# Altium PCB pwm-tl494-smd.PcbDoc
Units mm, origin at the board's own origin, x right, y up, seen from the top; angles counter-clockwise.
Board outline 22 x 59.5 mm, 2 copper layers (Top Layer, Bottom Layer), stack 1.671 mm thick; 44 components, 38 nets, 155 pads, 35 vias.
Unrouted connection lines stored in the file: 19.
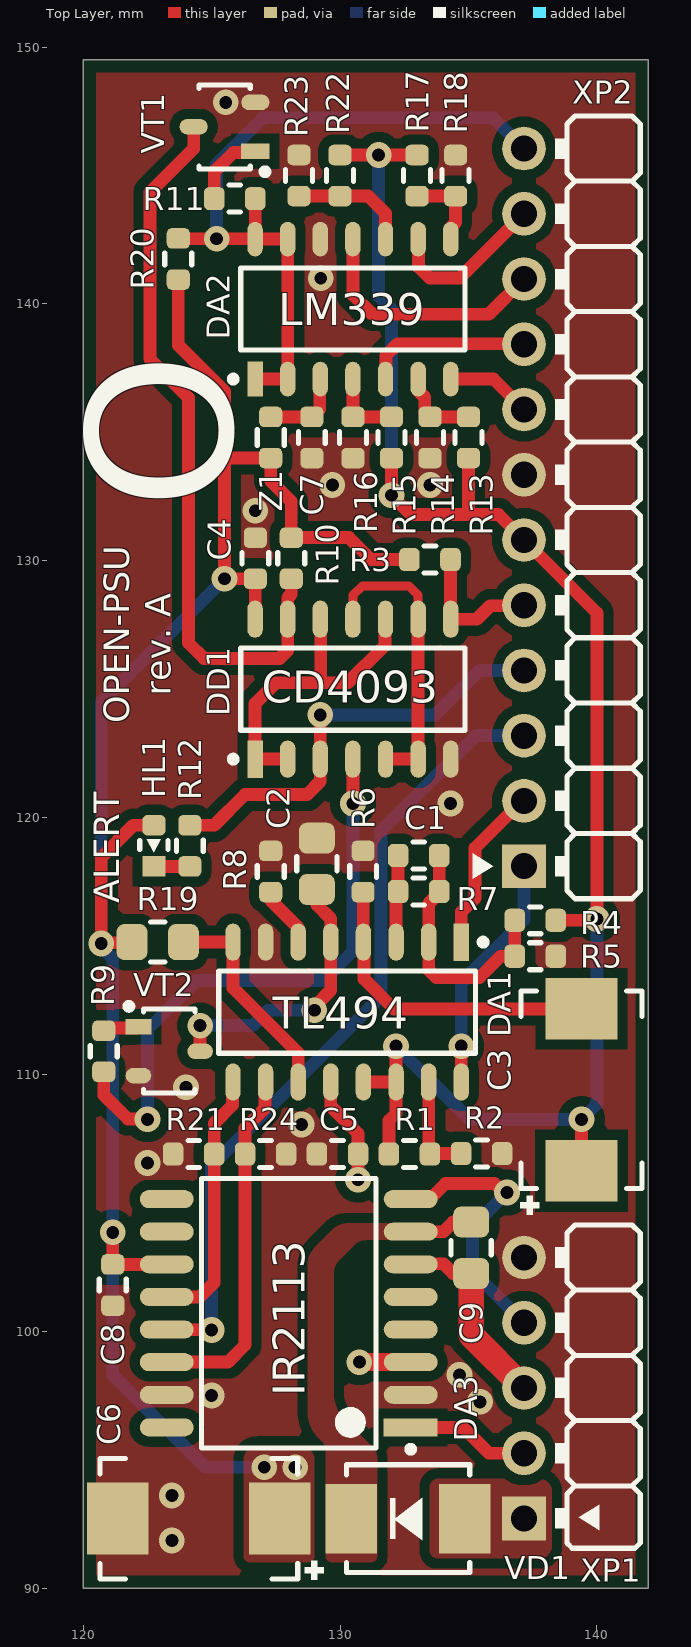
[diagram p0: Top Layer view]
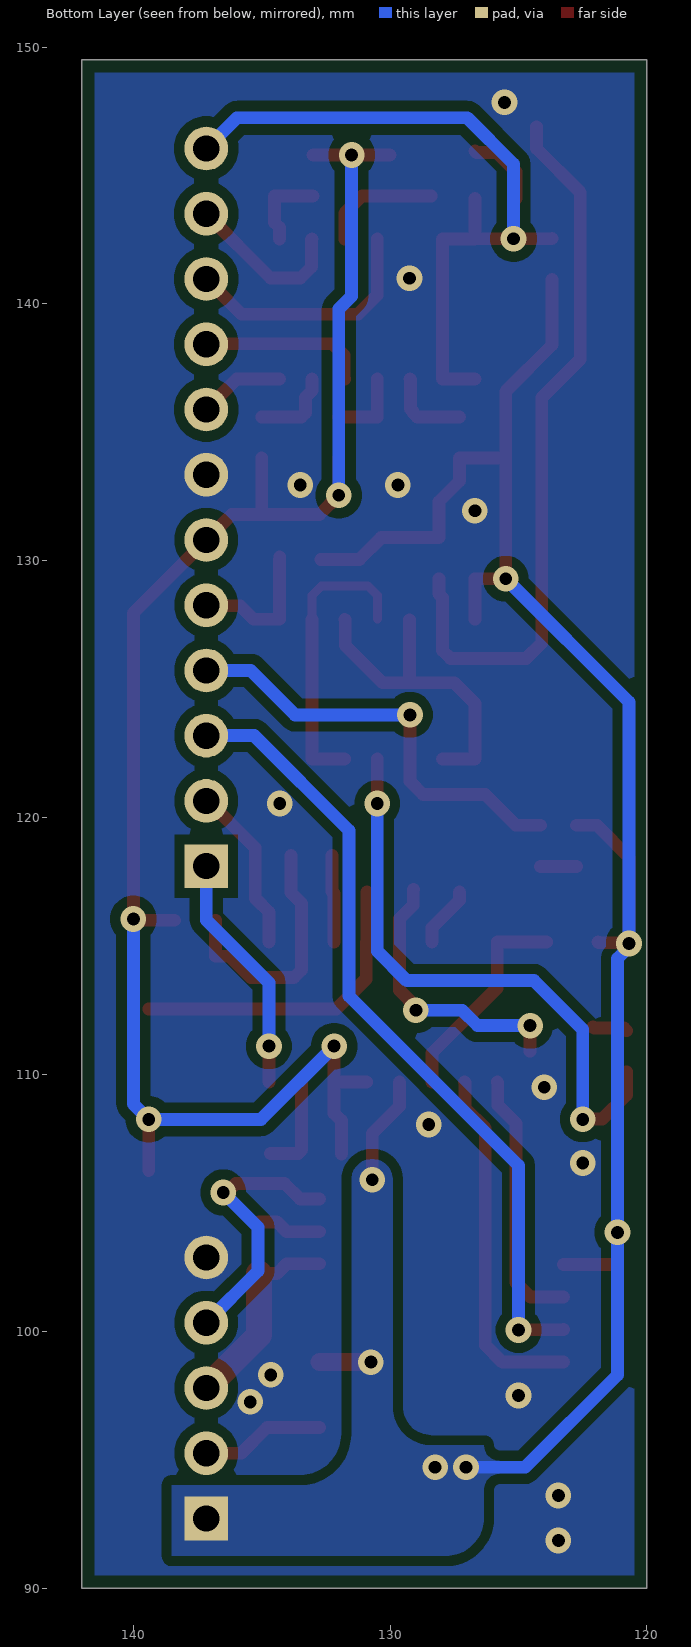
[diagram p1: Bottom Layer view, seen from below]
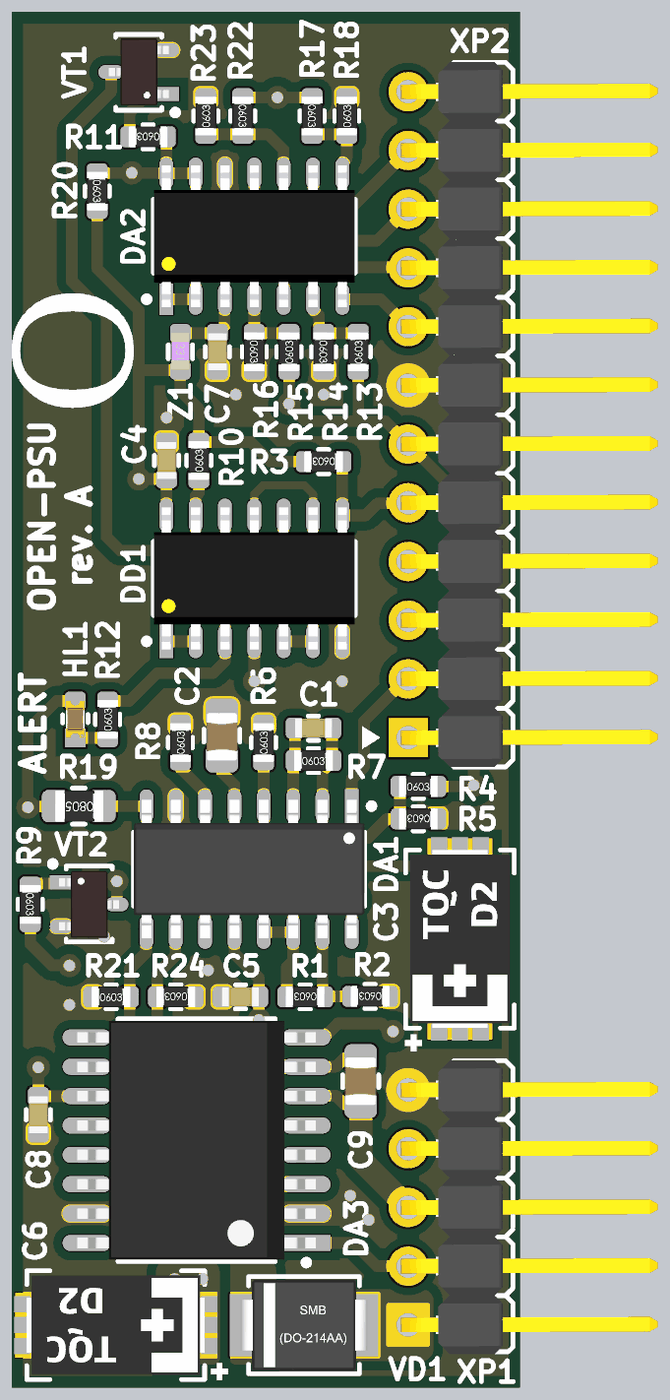
[diagram p2: 3D render of the assembled board from above, using the file's embedded part models]

## Layer stack, top to bottom
Top Solder: solder mask 0.0102, Solder Resist, Dk 3.5
Top Layer: signal copper 0.0356
Dielectric 1: dielectric 1.6, FR-4, Dk 4.8
Bottom Layer: signal copper 0.0356
Bottom Solder: solder mask 0.0102, Solder Resist, Dk 3.5

## Board outline
120,90 142,90 142,149.5 120,149.5

## Design rules (kind name [scope] priority, off if disabled: settings)
Clearance [All] p1: gap=0.4 ignorepadtopadclearanceinfootprint=FALSE
HoleSize [All] p1: absolutevalues=TRUE maxlimit=5 minlimit=0.3 maxpercent=80.000 minpercent=20.000
HoleToHoleClearance [All] p1: gap=0.5 allowstackedmicrovias=TRUE
MinimumSolderMaskSliver [All] p1: minsoldermaskwidth=0.2
PlaneClearance [All] p1: clearance=0.4
PlaneConnect [All] p1: planeconnectstyle=Direct reliefexpansion=0.508 reliefentries=4 reliefconductorwidth=0.254 reliefairgap=0.254
PolygonConnect [All] p1: connectstyle=Direct reliefconductorwidth=0.254 reliefentries=4 polygonreliefangle="90 Angle" airgapwidth=0.254
RoutingVias [All] p1: holewidth=0.5 width=1 viastyle="Through Hole" minholewidth=0.5 minwidth=1 maxholewidth=2.5 maxwidth=3
SilkToSilkClearance [All] p1: silktosilkclearance=0.2
SilkToSolderMaskClearance [IsPad] p1: minsilkscreentomaskgap=0.1 clearancetoexposedcopper=TRUE
SolderMaskExpansion [All] p1: expansion=0.1 istentingtop=FALSE
Width [All] p1: maxlimit=2.5 minlimit=0.3 preferedwidth=0.5 minimp=50.000000 maximp=50.000000 favimp=50.000000
23 further rules are at their usual default settings.

## Classes and differential pairs
component class pwm-tl494-smd: C1 C2 C3 C4 C5 C6 C7 C8 C9 DA1 DA2 DA3 DD1 HL1 R1 R2 R3 R4 R5 R6 R7 R8 R9 R10 R11 R12 R13 R14 R15 R16 R17 R18 R20 R21 R24 VD1 VT1 VT2 XP1 XP2 Z1

## Components (designator, comment, footprint, x,y, rotation, side; value= is the part's Value field where it differs from the comment)
C1 "0.1u" CAP0603 133.06,118.52 r0 top
C2 "0.022u" CAP0805-0.95 129.1,118.2 r270 top
C3 "22u" CAP_TQC_D2 139.4,109.4 r90 top
C4 "0.1u" CAP0603 126.7,130.1 r90 top
C5 "0.1u" CAP0603 129.9,106.9 r0 top
C6 "22u" CAP_TQC_D2 124.5,92.7 r180 top
C7 "0.1u" CAP0603 128.9,134.8 r270 top
C8 "0.1u" CAP0603 121.15,101.8 r90 top
C9 "1u" CAP0805-1.35 135.1,103.25 r90 top
DA1 "TL494ID" SOIC-16 130.275,112.425 r270 top
DA2 "LM339DR" SOIC-14#1 130.5,139.8 r90 top
DA3 "IR2113SPBF" SO-16W 128,100.7 r180 top
DD1 "CD4093BM" SOIC-14#2 130.5,125 r90 top
HL1 "KP-1608SURC" LED0603R 122.75,118.9 r90 top
R1 "2k" RES0603B 132.7,106.9 r180 top
R2 "10k" RES0603B 135.51,106.92 r180 top
R3 "10k" RES0603B 133.5,130.05 r180 top
R4 "10k" RES0603B 137.6,116 r0 top
R5 "10k" RES0603B 137.6,114.6 r180 top
R6 "10k" RES0603B 130.9,117.9 r90 top
R7 "10k" RES0603B 133.06,117.12 r0 top
R8 "47k" RES0603B 127.3,117.9 r90 top
R9 "1k" RES0603B 120.8,110.9 r270 top
R10 "10k" RES0603B 128.1,130.1 r90 top
R11 "1k" RES0603B 125.9,144.1 r180 top
R12 "1k" RES0603B 124.15,118.9 r90 top
R13 "1k" RES0603B 135,134.8 r90 top
R14 "1k" RES0603B 133.5,134.8 r270 top
R15 "1k" RES0603B 132,134.8 r90 top
R16 "1k" RES0603B 130.5,134.8 r270 top
R17 "1k" RES0603B 133,145 r270 top
R18 "1k" RES0603B 134.5,145 r90 top
R19 "100" RES0805B 122.9,115.145 r180 top
R20 "10k" RES0603B 123.7,141.75 r270 top
R21 "2k" RES0603B 124.3,106.9 r0 top
R22 "1k" RES0603B 130,145 r270 top
R23 "1k" RES0603B 128.4,145 r90 top
R24 "2k" RES0603B 127.1,106.9 r180 top
VD1 "MURS240T3G" SMB 132.65,92.7 r0 top
VT1 "BC846B,215" SOT23-3#1 125.5,146.9 r180 top
VT2 "BC846B,215" SOT23-3#2 123.35,110.9 r0 top
XP1 "PLS-5R" PLS-5R 137.16,92.71 r90 top locked
XP2 "PLS-12R" PLS-12R 137.16,118.11 r90 top locked
Z1 "BLM18AG331SN1D" BLM0603P 127.3,134.8 r270 top

## Footprints (in the part's own frame and the unit in brackets; to place one, negate y for a bottom-side part, rotate by r counter-clockwise, add the part's x,y. Pads: shape width x height; smd on the part's side, far side on the other; paste and mask are expansions set on the pad)
BLM0603P [mm] "Filter 0603"
  rrect50% 0.8x0.9 smd mask+0.05: 1(-0.8,0) 2(0.8,0)
  silkscreen extent -0.3,-0.53 0.3,0.53, body extent -0.82,-0.4 0.78,0.4, height 0.8
CAP0603 [mm] "Capacitor 0603"
  rrect50% 0.8x0.9 smd: 1(-0.8,0) 2(0.8,0)
  silkscreen extent -0.22,-0.53 0.23,0.53, body extent -0.8,-0.41 0.8,0.41, height 0.82
CAP0805-0.95 [mm] "Capacitor 0805"
  rrect50% 1.2x1.4 smd: 1(-1,-0.005) 2(1,-0.005)
  silkscreen extent -0.28,-0.78 0.28,0.77, body extent -1,-0.67 1.1,0.68, height 0.95
CAP0805-1.35 [mm] "Capacitor 0805"
  rrect50% 1.2x1.4 smd: 1(-1,-0.005) 2(1,-0.005)
  silkscreen extent -0.28,-0.78 0.28,0.77, body extent -1.05,-0.67 1.05,0.68, height 1.35
CAP_TQC_D2 [mm] "Capacitor TQC-Series D2 Package"
  rect 2.4x2.8 smd paste-50 mask+0.05: 1(-3.15,0) 2(3.15,0)
  silkscreen extent -4.87,-2.35 3.85,2.38, body extent -3.85,-2.15 3.85,2.15, height 1.9
LED0603R [mm] "LED 0603 Red"
  rect 0.8x0.9 smd: 1(-0.8,0)
  rrect50% 0.8x0.9 smd: 2(0.8,0)
  silkscreen extent -0.25,-0.55 0.25,0.55, body extent -0.8,-0.4 0.8,0.4, height 0.6
PLS-5R [mm]
  rect 1.7x1.7 hole 1.02: 1(0,0)
  round 1.7 hole 1.02: 2(2.54,0) 3(5.08,0) 4(7.62,0) 5(10.16,0)
  silkscreen extent -1.16,-4.53 11.43,-1.2, body extent -1.27,-10.8 11.44,0.32, height 3.09
PLS-12R [mm]
  rect 1.7x1.7 hole 1.02: 1(0,0)
  round 1.7 hole 1.02: 2(2.54,0) 3(5.08,0) 4(7.62,0) 5(10.16,0) 6(12.7,0) 7(15.24,0) 9(20.32,0) 10(22.86,0) 11(25.4,0) 12(27.94,0)
  round 1.7 hole 1.02 paste+0: 8(17.78,0)
  silkscreen extent -1.27,-4.53 29.21,1.99, body extent -1.27,-10.8 29.22,0.32, height 3.09
RES0603B [mm] "Resistor 0603"
  rrect50% 0.8x0.9 smd: 1(-0.8,0) 2(0.8,0)
  silkscreen extent -0.23,-0.53 0.23,0.53, body extent -0.85,-0.45 0.85,0.45, height 0.56
RES0805B [mm] "Resistor 0805"
  rrect50% 1.2x1.4 smd: 1(-1,-0.005) 2(1,-0.005)
  silkscreen extent -0.28,-0.78 0.28,0.77, body extent -1.07,-0.67 1.03,0.68, height 0.61
SMB [mm] "DO-214AA"
  rect 2x2.7 smd: 1(-2.21,0) 2(2.21,0)
  silkscreen extent -2.4,-2.1 2.4,2.1, body extent -2.75,-1.95 2.75,1.95, height 2.45
SO-16W [mm] "SOIC, 16-Leads, Body 10.29x7.49mm, Pitch 1.27mm, IPC Medium Density"
  rect 2.1x0.7 smd paste+0 mask+0.05: 1(-4.75,4.445)
  oval 2.1x0.7 smd paste+0 mask+0.05: 2(-4.75,3.175) 3(-4.75,1.905) 4(-4.75,0.635) 5(-4.75,-0.635) 6(-4.75,-1.905) 7(-4.75,-3.175) 8(-4.75,-4.445) 9(4.75,-4.445) 10(4.75,-3.175) 11(4.75,-1.905) 12(4.75,-0.635) 13(4.75,0.635) 14(4.75,1.905) 15(4.75,3.175) 16(4.75,4.445)
  silkscreen extent -4.88,-5.25 3.4,5.42, body extent -5.15,-5.17 5.16,5.17, height 2.48
SOIC-14#1 [mm] "package SOIC-14, 150 mil"
  rect 1.35x0.6 smd paste+0 mask+0.05: 1(-2.725,3.81)
  oval 1.35x0.6 smd paste+0 mask+0.05: 2(-2.725,2.54) 3(-2.725,1.27) 4(-2.725,0) 5(-2.725,-1.27) 6(-2.725,-2.54) 7(-2.725,-3.81) 8(2.725,-3.81) 9(2.725,-2.54) 10(2.725,-1.27) 11(2.725,0) 12(2.725,1.27) 13(2.725,2.54) 14(2.725,3.81)
  silkscreen extent -2.85,-4.37 1.6,4.78, body extent -3.07,-4.35 3.07,4.35, height 1.73
SOIC-14#2 [mm] "package SOIC-14, 150 mil"
  rect 1.45x0.6 smd paste+0 mask+0.05: 1(-2.725,3.81)
  oval 1.45x0.6 smd paste+0 mask+0.05: 2(-2.725,2.54) 3(-2.725,1.27) 4(-2.725,0) 5(-2.725,-1.27) 6(-2.725,-2.54) 7(-2.725,-3.81) 8(2.725,-3.81) 9(2.725,-2.54) 10(2.725,-1.27) 11(2.725,0) 12(2.725,1.27) 13(2.725,2.54) 14(2.725,3.81)
  silkscreen extent -2.85,-4.37 1.6,4.78, body extent -3.07,-4.35 3.07,4.35, height 1.73
SOIC-16 [mm] "package SOIC-16, 150 mil"
  rect 1.45x0.6 smd paste+0 mask+0.05: 1(-2.725,4.445)
  oval 1.45x0.6 smd paste+0 mask+0.05: 2(-2.725,3.175) 3(-2.725,1.905) 4(-2.725,0.635) 5(-2.725,-0.635) 6(-2.725,-1.905) 7(-2.725,-3.175) 8(-2.725,-4.445) 9(2.725,-4.445) 10(2.725,-3.175) 11(2.725,-1.905) 12(2.725,-0.635) 13(2.725,0.635) 14(2.725,1.905) 15(2.725,3.175) 16(2.725,4.445)
  silkscreen extent -2.85,-5 1.6,5.42, body extent -3,-5 3,5, height 1.75
SOT23-3#1 [mm] "SOT23, 6-Leads, Body 2.90x2.80mm, Pitch 0.95mm, IPC Medium Density"
  rect 1.1x0.6 smd paste+0 mask+0.05: 1(-1.2,0.95)
  oval 1.1x0.6 smd paste+0 mask+0.05: 2(-1.2,-0.95) 3(1.2,0)
  silkscreen extent -1.7,-1.63 1,1.87, body extent -1.3,-1.45 1.3,1.45, height 1.14
SOT23-3#2 [mm] "SOT23, 6-Leads, Body 2.90x2.80mm, Pitch 0.95mm, IPC Medium Density"
  rect 1x0.6 smd paste+0 mask+0.05: 1(-1.2,0.95)
  oval 1x0.6 smd paste+0 mask+0.05: 2(-1.2,-0.95) 3(1.2,0)
  silkscreen extent -1.7,-1.63 1,1.87, body extent -1.3,-1.45 1.3,1.45, height 1.14

## Part data
C1 C4 C5 C7 C8: library part C0603, "Capacitors 0603 package case", Dielectric=X7R, Manufacturer="Samsung Sdi Co. Ltd", Package=0603, Part Number=CL10B104KB8NNNC, Tolerance="± 10 %", Voltage=50V, Value on schem=0.1u
C2: library part C0805, "Capacitors 0805 package case", Dielectric=NP0, Manufacturer=SAMSUNG, Package=0805, Part Number=CL21C222JBFNNNG, Tolerance="± 5 %", Voltage=50V, Value on schem=0.022u
C3 C6: library part C_TQC_D2, "Conductive Polymer Tantalum Solid Capacitors TQC-Series. Case code D2", Manufacturer=Matsushita, Package=D2, Part Number=25TQC22MV, Tolerance="± 20 %", Voltage=25V, Value on schem=22u
C9: library part C0805, "Capacitors 0805 package case", Dielectric=X7R, Manufacturer=SAMSUNG, Package=0805, Part Number=CL21B105KBFNNNE, Tolerance="± 10 %", Voltage=50V, Value on schem=1u
DA1: "Pulse-Width-Modulation Control Circuits", Manufacturer="Texas Instruments", Package=SOIC-16, Part Number=TL494ID
DA2: "Quad Comparators", Manufacturer="Texas Instruments", Package=SOIC-14, Part Number=LM339DR
DA3: "HIGH AND LOW SIDE DRIVER", Manufacturer="International Rectifier", Package=SO-16W, Part Number=IR2113SPBF
DD1: "Quad 2-Input NAND Gate Schmitt Triggers", Manufacturer="Texas Instruments", Package=SOIC-14, Part Number=CD4093BM
HL1: "Hyper red led (package case 0603)", Color="Hyper red", Manufacturer="Kingbright Company LLC.", Package=0603, Part Number=KP-1608SURC
R1 R21 R24: library part R0603, "Resistor 0603 package case", Manufacturer=Yageo, Package=0603, Part Number=RC0603FR-072KL, Tolerance="± 1 %", Value on schem=2k
R2 R3 R4 R5 R6 R7 R10 R20: library part R0603, "Resistor 0603 package case", Manufacturer=Yageo, Package=0603, Part Number=RC0603FR-0710KL, Tolerance="± 1 %", Value on schem=10k
R8: library part R0603, "Resistor 0603 package case", Manufacturer=Yageo, Package=0603, Part Number=RC0603FR-0747KL, Tolerance="± 1 %", Value on schem=47k
R9 R11 R12 R13 R14 R15 R16 R17 R18 R22 R23: library part R0603, "Resistor 0603 package case", Manufacturer=Yageo, Package=0603, Part Number=RC0603FR-071KL, Tolerance="± 1 %", Value on schem=1k
R19: library part R0805, "Resistor 0805 package case", Manufacturer=Yageo, Package=0805, Part Number=RC0805FR-07100RL, Temperature coefficient=±100ppm/°C, Tolerance="± 1 %", Voltage=150V, Value on schem=100
VD1: "Diode 400V, 2A", Manufacturer="ON Semiconductor", Package="DO-214AA, SMB", Part Number=MURS240T3G
VT1 VT2: "General Purpose n-p-n Transistors", Manufacturer="Nexperia USA Inc.", Package=SOT23-3, Part Number=BC846B,215
Z1: "Power line filter, imperdance 330 Ohm (current 05A)", Package=0603, Part Number=BLM18AG331SN1D

## Via types
v1: diameter 1, hole 0.5, Top Layer to Bottom Layer, tented both sides, 35 vias

## Nets (pads, with @x,y where several pads share a name; then routed paths per layer and width w, separated by ;. In a path a pad name is that pad's centre, name@x,y a point inside that pad or via, vN(x,y) a via of type N, cw(c..) or ccw(c..) an arc to the next point about the centre after c; other vN are vias at no path point)
ALERT: DD1.3 R12.2 XP2.4 | length 17
  Top Layer w0.5: R12.2 125.1,119.7 126.3,120.9 128.718,120.9 129.23,121.412 DD1.3 v1(129.23,124)
  Bottom Layer w0.5: v1(129.23,124) 133.7,124 135.43,125.73 XP2.4
CLOCK_OFF: DD1.4 R9.2 | length 23.2
  Top Layer w0.5: R9.2 120.8,109.2 121.741,108.259 122.491,108.259 v1(122.5,108.25) ; v1(130.5,120.55) DD1.4
  Bottom Layer w0.5: v1(122.5,108.25) 122.5,111.75 124.4,113.65 129.35,113.65 130.5,114.8 v1(130.5,120.55)
CLR_ALERT: DD1.8 R3.1 XP2.5 | length 5.5
  Top Layer w0.5: R3.1@134.3,130.15 R3.1 134.305,130.045 134.305,127.73 DD1.8 135.325,127.725 135.85,128.25 137.14,128.25 XP2.5
FB_CURRENT: DA1.16 XP2.1 | length 9.4
  Top Layer w0.5: DA1.16 v1(134.72,111.1)
  Bottom Layer w0.5: v1(134.72,111.1) 134.72,113.57 137.16,116.01 XP2.1
FB_VOLTAGE: DA1.1 XP2.2 | length 6.6
  Top Layer w0.5: DA1.1 134.72,116.328 135.25,116.858 135.25,118.819 137.081,120.65 XP2.2
GND: C2.1 C4.2 C5.1 C6.2 C7.2 C8.1 DA1.7 DA2.12 DA3.2 DA3.15 DD1.7 R2.1 R5.1 R6.2 R8.2 R14.2 R16.2 R18.2 R21.1 R23.2 R24.1 VT1.2 VT2.2 XP1.5 XP2.7
  other v1: 123.45,91.85 123.45,93.6 135.45,97.25 125,97.5 134.65,98.3 122.5,106.55 128.5,108.05 124,109.5 134.3,120.55 126.7,131.95 129.7,132.95 133.5,132.95 129.25,141 125.55,147.85
NetC1_1: C1.1 DA1.3 R7.1 | length 3.4
  Top Layer w0.5: DA1.3 132.18,117.04 R7.1 C1.1
NetC1_2: C1.2 DA1.2 R4.1 R5.2 R7.2 | length 9.8
  Top Layer w0.5: C1.2 133.86,117.07 133.45,116.66 133.45,114.068 133.743,113.775 135.425,113.775 136.25,114.6 R5.2 R4.1
NetC2_2: C2.2 DA1.5 VT2.3 | length 10.9
  Top Layer w0.5: VT2.3 v1(124.55,111.9) ; v1(129,112.5) 129,112.635 129.64,113.275 DA1.5 129.64,116.06 129.1,116.6 129.1,117.195 C2.2
  Bottom Layer w0.5: v1(124.55,111.9) 126.6,111.9 127.2,112.5 v1(129,112.5)
NetC3_2: C3.2 DA1.4 R6.1 | length 12.3
  Top Layer w0.5: R6.1 130.905,117.095 130.905,115.155 DA1.4 130.929,115.131 130.929,113.721 132.1,112.55 C3.2
NetC7_1: C7.1 DA2.3 Z1.1 | length 3.2
  Top Layer w0.5: Z1.1 C7.1 128.95,135.6 129.1,135.75 129.1,135.8 129.211,135.911 129.211,137.056 DA2.3
NetC9_2: C9.2 DA3.7 VD1.1 | length 2.5
  Top Layer w0.5: DA3.7 134.025,103.875 134.4,104.25 C9.2
NetDA1_6: DA1.6 R8.1 | length 2.4
  Top Layer w0.5: R8.1 127.3,116.783 128.37,115.713 DA1.6
NetDA1_8: DA1.8 DA1.11 R19.1 | length 8.4
  Top Layer w0.5: R19.1 DA1.8 125.83,113.37 128.37,110.83 DA1.11
NetDA1_9: DA1.9 DA3.12 R21.2 | length 10.2
  Top Layer w0.5: DA3.12 124.535,101.335 125.1,101.9 125.1,107 125.1,108.1 125.811,108.811 125.811,109.681 DA1.9
NetDA1_10: DA1.10 DA3.14 R24.2 | length 13.9
  Top Layer w0.5: DA3.14 125.635,98.795 126.3,99.46 126.3,107 126.3,107.9 127.081,108.681 127.081,109.681 DA1.10
NetDA1_15: DA1.15 R1.1 R2.2 | length 3.9
  Top Layer w0.5: DA1.15 133.45,107.05 R1.1@133.5,107 ; R1.1@133.52,107.02 R1.1@133.5,107 ; R2.2@134.66,106.92 133.58,106.92 R1.1@133.5,107
NetDD1_1: DD1.1 DD1.2 DD1.10 DD1.12 | length 12.9
  Top Layer w0.5: DD1.2 DD1.1 126.69,124.436 127.504,125.25 129.25,125.25 130.3,125.25 131.751,126.701 131.751,127.706 DD1.10 ; DD1.12@129.249,127.21 DD1.12@129.249,127.704 ; 129.25,125.27 DD1.12@129.25,127.209
NetDD1_5: DD1.5 DD1.6 DD1.9 DD1.11 | length 11.4
  Top Layer w0.35: DD1.11 130.5,128.65 130.875,129.025 132.665,129.025 133.04,128.65 DD1.9
  Top Layer w0.5: DD1.5 DD1.6 DD1.9
NetDD1_13: DD1.13 R10.1 VT1.3 | length 28.5
  Top Layer w0.5: VT1.3 124.3,146.05 122.6,144.35 122.6,137.85 124.1,136.35 124.1,126.8 124.7,126.2 127.65,126.2 127.96,126.51 DD1.13 127.96,128.56 128.1,128.7 R10.1
NetHL1_1: HL1.1 R12.1 | length 1.4
  Top Layer w0.5: HL1.1 R12.1
NetR9_1: R9.1 VT2.1 | length 1.4
  Top Layer w0.5: R9.1 120.9,111.8 122.05,111.8 VT2.1@122.1,111.85
NetR11_2: R11.2 VT1.1 | length 3
  Top Layer w0.5: R11.2 125.1,145.15 125.85,145.9 126.65,145.9 VT1.1
OVER_CURRENT_HALF_BRIDGE: DA2.7 XP2.8 | length 3.3
  Top Layer w0.5: DA2.7 135.975,137.075 XP2.8
OVER_CURRENT_HALF_BRIDGE_TH: DA2.6 R13.2 R14.1 | length 3.2
  Top Layer w0.5: DA2.6 133.04,136.623 133.3,136.363 133.3,135.75 133.45,135.6 R14.1 R13.2
OVER_CURRENT_RECTIFIER: DA2.5 XP2.9 | length 6.5
  Top Layer w0.5: DA2.5 131.789,137.094 131.789,137.989 132.25,138.45 137.14,138.45 XP2.9
OVER_CURRENT_RECTIFIER_TH: DA2.4 R15.2 R16.1 | length 3
  Top Layer w0.5: DA2.4 R16.1 R15.2
OVER_TEMP_HALF_BRIDGE: DA2.11 XP2.10 | length 9.7
  Top Layer w0.5: DA2.11 130.5,140.35 131.25,139.6 135.79,139.6 XP2.10
OVER_TEMP_HALF_BRIDGE_TH: DA2.8 R17.2 R18.1 | length 3.3
  Top Layer w0.5: R17.2 R18.1 134.5,143.167 134.31,142.977 DA2.8
OVER_TEMP_RECTIFIER: DA2.9 XP2.11 | length 6.4
  Top Layer w0.5: DA2.9 133.059,142.506 133.059,141.441 133.493,141.007 134.657,141.007 XP2.11
OVER_TEMP_RECTIFIER_TH: DA2.10 R22.2 R23.1 | length 4.7
  Top Layer w0.5: R23.1 131.1,144.2 131.77,143.53 DA2.10
PWM_H: DA3.8 XP1.4 | length 10.6
  Top Layer w0.5: DA3.8 133.504,105.145 134.109,105.75 136.015,105.75 136.365,105.4 v1(136.5,105.4)
  Bottom Layer w0.5: v1(136.5,105.4) 135.15,104.05 135.15,102.34 XP1.4
PWM_L: DA3.1 XP1.2 | length 4.8
  Top Layer w0.5: DA3.1 134.795,96.255 135.8,95.25 XP1.2
REF_5V0: C3.1 DA1.13 DA1.14 R1.2 R4.2 R13.1 R15.1 R17.1 R22.1 XP2.6 | length 67.6
  Top Layer w0.5: R22.1 v1(131.5,145.8) R17.1 ; DA1.13 DA1.14 ; R1.2 131.9,108.2 132.18,108.48 DA1.14 ; R15.1 v1(132,132.55) 132.75,131.8 135,131.8 ; v1(132.18,111.1) DA1.14 ; R13.1 135,131.8 ; R4.2 139.95,116 v1(140,116.05) 140,127.97 XP2.6 136.17,131.8 135,131.8 ; C3.1 v1(139.4,108.25)
  Bottom Layer w0.5: v1(131.5,145.8) 131.5,140.3 132,139.8 v1(132,132.55) ; v1(132.18,111.1) 135.03,108.25 v1(139.4,108.25) 140,108.85 v1(140,116.05)
SD#: DA3.13 XP2.3 | length 31
  Top Layer w0.5: DA3.13 123.258,100.058 124.992,100.058 v1(125,100.05)
  Bottom Layer w0.5: v1(125,100.05) 125,106.45 131.6,113.05 131.6,119.5 135.29,123.19 XP2.3
SHUTDOWN: DA2.1 DA2.2 DA2.13 DA2.14 R11.1 R20.1 XP2.12 | length 28.7
  Top Layer w0.5: R20.1 123.713,142.537 v1(125.195,142.537) 126.678,142.537 DA2.14 ; DA2.1 DA2.2 DA2.13 DA2.14 ; R11.1 126.695,144.095 126.695,142.53 DA2.14
  Bottom Layer w0.5: v1(125.195,142.537) 125.195,145.445 127,147.25 135.96,147.25 XP2.12
VCC_12V: C4.1 C5.2 C6.1 C8.2 DA1.12 DA3.3 DA3.11 DD1.14 HL1.2 R3.2 R10.2 R19.2 R20.2 VD1.2 XP1.1 Z1.2 | length 82.8
  Top Layer w0.5: v1(121.15,103.85) C8.2 121.152,102.602 123.248,102.602 DA3.11 ; R19.2 121.875,115.125 120.725,115.125 v1(120.7,115.1) 120.7,118.45 121.95,119.7 HL1.2 ; R20.2 123.7,138.4 125.5,136.6 125.5,134 ; DD1.14 126.695,127.73 126.695,129.295 C4.1 v1(125.5,129.3) 125.5,134 ; DA1.12 129.64,108.76 130.7,107.7 C5.2 v1(130.7,105.9) ; R3.2 131.2,130.05 130.35,130.9 R10.2 128.1,132.304 127.3,133.104 Z1.2 125.5,134
  Top Layer w0.7: v1(130.75,98.795) DA3.3
  Bottom Layer w0.5: v1(125.5,129.3) 120.7,124.5 v1(120.7,115.1) 120.7,114.965 121.15,114.515 v1(121.15,103.85) 121.15,98.3 124.75,94.7 v1(127.05,94.7) v1@127.15,94.7
  other v1: 128.25,94.7
VS: C9.1 DA3.6 XP1.3 | length 7.8
  Top Layer w0.5: DA3.6@132.75,102.625 134.025,102.625 134.4,102.25 C9.1
  Top Layer w1: C9.1 135.105,99.845 XP1.3
pads on no net: DA3.4 DA3.5 DA3.9 DA3.10 DA3.16

## Polygon pours and split planes (outlines as drawn)
GND on Top Layer "GND_POLY_TOP" (solid, remove dead copper, pour order 6): 120.5,149 120.5,90.5 141.5,90.5 141.5,149
NetC9_2 on Top Layer "NONET_L-01_P-001" (solid, pour order 5): 132.85,104.2 130.279,104.2 ccw(c130.279,103.405) 129.717,103.967 129.033,103.283 ccw(c129.715,102.6) 128.75,102.6 128.75,96.862 ccw(c130.228,96.862) 129.183,95.817 129.309,95.691 cw(c128.967,95.35) 129.45,95.35 129.45,91.25 ccw(c129.7,91.25) 129.7,91 131.2,91 ccw(c131.2,91.25) 131.45,91.25 131.45,95 ccw(c130.726,95) 131.238,95.512 130.148,96.602 cw(c131.107,97.562) 129.75,97.562 129.75,102.25 cw(c130.474,102.25) 129.962,102.762 130.573,103.373 cw(c131,102.947) 131,103.55 132.85,103.55
VCC_12V on Top Layer "NONET_L-01_P-001" (solid, pour order 4): 126.25,91.25 126.25,95 cw(c126.75,95) 126.75,95.5 128.5,95.5 cw(c128.5,95) 129,95 129,91.25 cw(c128.75,91.25) 128.75,91 126.5,91 cw(c126.5,91.25)
VCC_12V on Top Layer "NONET_L-01_P-001" (solid, pour order 2): 133.8,94.25 137.75,94.25 cw(c137.75,93.75) 138.25,93.75 138.25,91.65 cw(c137.75,91.65) 137.75,91.15 133.8,91.15 cw(c133.8,91.45) 133.5,91.45 133.5,93.95 cw(c133.8,93.95)
GND on Bottom Layer "GND_POLY_BOT" (solid, remove dead copper, pour order 3): 120.5,149 120.5,90.5 141.5,90.5 141.5,149
VCC_12V on Bottom Layer "NONET_L-01_P-001" (solid, pour order 1): 138.5,94 133.5,94 cw(c133.5,96) 131.5,96 131.5,105.9 ccw(c130.7,105.9) 130.7,106.7 ccw(c130.7,105.9) 129.9,105.9 129.9,97.05 cw(c128.4,97.05) 128.4,95.55 126.35,95.55 cw(c125.75,95.55) 125.75,94.95 125.75,94.45 cw(c125.75,93.85) 126.35,93.85 126.35,92.75 ccw(c127.85,92.75) 127.85,91.25 138.5,91.25

## Silkscreen, mask and mechanical layers (free items; w line width, h text height)
Top Overlay:
  text "LM339" at 127.584,139.175 h1.25
  text "O" at 127.69,131.982 h10 r90
  text "rev. A" at 123.4,124.751 h1 r90
  text "CD4093" at 126.959,124.475 h1.25
  text "OPEN-PSU" at 121.8,123.668 h1 r90
  text "ALERT" at 121.4,116.667 h1 r90
  text "TL494" at 127.384,111.775 h1.25
  text "IR2113" at 128.625,97.472 h1.25 r90
Outline:
  the board outline again, w0.2
Top Assy (Mech13):
  lines w0.05: 142,92.39 142,90 120,90 120,149.5 142,149.5 142,146.37 ; 142,93.03 142,94.93 ; 142,95.57 142,97.47 ; 142,98.11 142,100.01 ; 142,100.65 142,102.55 ; 142,103.19 142,117.79 ; 142,118.43 142,120.33 ; 142,120.97 142,122.87 ; 142,123.51 142,125.41 ; 142,126.05 142,127.95 ; 142,128.59 142,130.49 ; 142,131.13 142,133.03 ; 142,133.67 142,135.57 ; 142,136.21 142,138.11 ; 142,138.75 142,140.65 ; 142,141.29 142,143.19 ; 142,143.83 142,145.73